# Altium PCB NBP-28 Pin_Swap_Example.PcbDoc (part 4 of 4)
Units mil, origin at the board's own origin, x right, y up, seen from the top; angles counter-clockwise.
Board outline 2716.54 x 4967.15 mil, 10 copper layers (Top Layer, Mid-Layer 1, VCC1V2, Mid-Layer 2, VCC, GND, MidLayer4, VCCINT, Mid-Layer 3, Bottom Layer), stack 81 mil thick; 254 components, 445 nets, 1667 pads, 770 vias.
Unrouted connection lines stored in the file: 611.
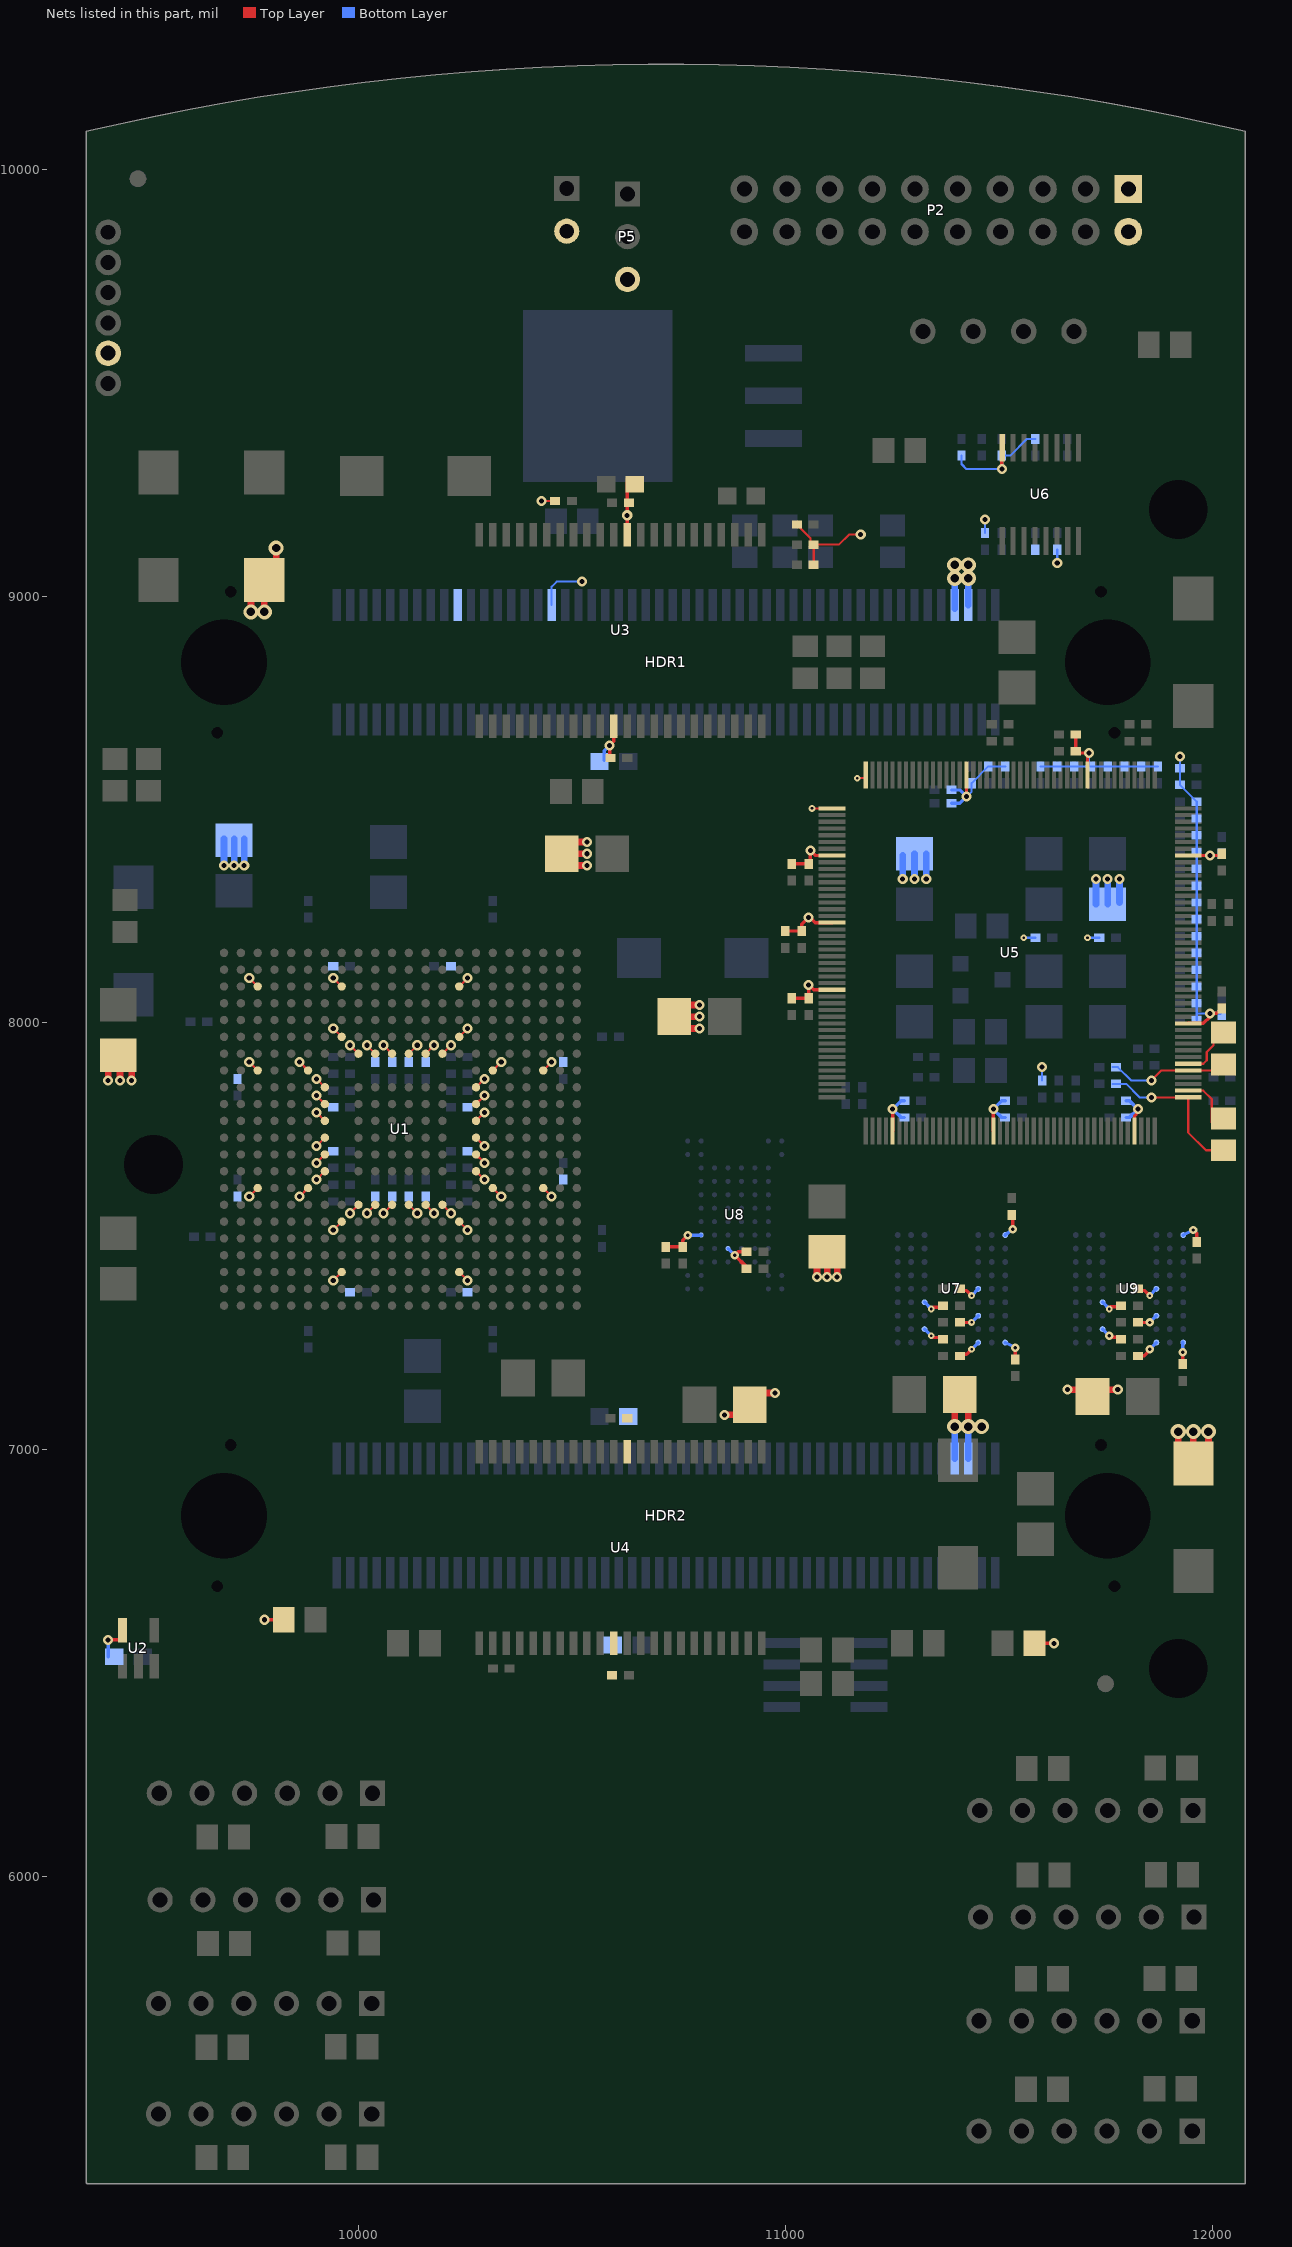
[diagram p11: the nets of this part, all layers, seen from the top]

## Via types
v1: diameter 23.62, hole 11.81, Top Layer to Bottom Layer, 495 vias
v2: diameter 78.74, hole 47.24, Top Layer to Bottom Layer, 101 vias
v3: diameter 15.75, hole 5.91, Top Layer to Bottom Layer, 92 vias
v4: diameter 35.43, hole 19.68, Top Layer to Bottom Layer, 59 vias
v5: diameter 19.68, hole 7.87, Top Layer to Bottom Layer, 23 vias

## Nets (pads, with @x,y where several pads share a name; then routed paths per layer and width w, separated by ;. In a path a pad name is that pad's centre, name@x,y a point inside that pad or via, vN(x,y) a via of type N, cw(c..) or ccw(c..) an arc to the next point about the centre after c; other vN are vias at no path point) (continued)
VCC3V3: C1.2 C12.1 C13.1 C14.1 C15.1 C30.1 C31.1 C32.1 C33.1 C34.1 C35.1 C36.1 C37.1 C38.1 C39.1 C40.1 C41.1 C42.1 C43.1 C44.1 C45.1 C46.1 C47.1 C48.1 C49.1 C50.1 C51.1 C52.1 C53.1 C54.1 C55.1 C56.1 C57.1 C58.1 C62.1 C66.1 C67.1 C68.1 C69.1 C70.1 C71.1 C72.1 C73.1 C74.1 C75.1 C76.1 C77.1 C78.1 C79.1 C80.1 C81.1 C82.1 C83.1 C84.1 C85.1 C86.1 C87.1 C102.1 C103.1 C104.1 C105.1 C106.1 C107.1 C108.1 C109.1 C110.1 C111.1 C112.1 C113.1 C114.1 C115.1 C116.1 C117.1 C118.1 C119.1 C120.1 C121.1 C122.1 C126.1 C127.1 HDR1.34 HDR1.94 HDR1.96 HDR2.94 HDR2.96 P1.2 P2.1 P2.2 P5.3 R1.1 R5.1 R15.2 R16.2 R17.2 R18.2 R20.2 R21.2 R22.2 R23.2 R24.2 R25.2 R26.2 R27.2 R28.2 R29.2 R30.2 R31.2 R32.2 R33.2 R34.2 R35.2 R39.2 R40.2 R41.2 R42.2 R43.2 R45.2 R48.2 R49.2 R50.2 R51.2 R52.2 R53.2 R54.2 R55.2 R56.2 R57.2 R61.1 R62.1 R67.1 TP1.1 U1.C8 U1.C15 U1.F8 U1.F15 U1.G9 U1.G10 U1.G11 U1.G12 U1.G13 U1.G14 U1.H3 U1.H6 U1.H17 U1.H20 U1.J7 U1.J16 U1.K7 U1.K16 U1.L7 U1.L16 U1.M7 U1.M16 U1.N7 U1.N16 U1.P7 U1.P16 U1.R3 U1.R6 U1.R17 U1.R20 U1.T9 U1.T10 U1.T11 U1.T12 U1.T13 U1.T14 U1.U8 U1.U15 U1.Y8 U1.Y15 U2.5 U3.11 U3.33 U4.11 U4.33 U5.1 U5.8 U5.18 U5.28 U5.49 U5.64 U5.85 U5.100 U5.125 U5.143 U5.161 U5.176 U6.16 U7.A7 U7.A9 U7.B3 U7.C7 U7.D3 U7.E7 U7.J9 U8.H7 U8.J5 U9.A7 U9.A9 U9.B3 U9.C7 U9.D3 U9.E7 U9.J9 | length 8194.9
  Top Layer w5: v1(9743.57,7593.48) U1.R3@9763.26,7613.17 ; v1(9743.57,7908.45) U1.H3@9763.26,7888.76 ; v1(9861.68,7593.48) U1.R6@9881.37,7613.17 ; v1(9861.68,7908.45) U1.H6@9881.37,7888.76 ; v1(9901.05,7632.85) U1.P7@9920.74,7652.54 ; v1(9901.05,7672.22) U1.N7@9920.74,7691.91 ; v1(9901.05,7711.59) U1.M7@9920.74,7731.28 ; v1(9901.05,7790.34) U1.L7@9920.74,7770.65 ; v1(9901.05,7829.71) U1.K7@9920.74,7810.02 ; v1(9901.05,7869.08) U1.J7@9920.74,7849.39 ; v1(9940.42,7396.63) U1.Y8@9960.11,7416.32 ; v1(9940.42,7514.74) U1.U8@9960.11,7534.43 ; v1(9940.42,7987.19) U1.F8@9960.11,7967.5 ; v1(9940.42,8105.3) U1.C8@9960.11,8085.61 ; v1(9979.79,7554.11) U1.T9@9999.48,7573.8 ; v1(9979.79,7947.82) U1.G9@9999.48,7928.13 ; v1(10019.16,7554.11) U1.T10@10038.85,7573.8 ; v1(10019.16,7947.82) U1.G10@10038.85,7928.13 ; v1(10058.53,7554.11) U1.T11@10078.22,7573.8 ; v1(10058.53,7947.82) U1.G11@10078.22,7928.13 ; U1.T12@10117.59,7573.8 v1(10137.27,7554.11) ; U1.G12@10117.59,7928.13 v1(10137.27,7947.82) ; U1.T13@10156.96,7573.8 v1(10176.64,7554.11) ; U1.G13@10156.96,7928.13 v1(10176.64,7947.82) ; U1.T14@10196.33,7573.8 v1(10216.01,7554.11) ; U1.G14@10196.33,7928.13 v1(10216.01,7947.82) ; U1.Y15@10235.7,7416.32 v1(10255.38,7396.63) ; U1.U15@10235.7,7534.43 v1(10255.38,7514.74) ; U1.F15@10235.7,7967.5 v1(10255.38,7987.19) ; U1.C15@10235.7,8085.61 v1(10255.38,8105.3) ; U1.P16@10275.07,7652.54 v1(10294.75,7632.85) ; U1.N16@10275.07,7691.91 v1(10294.75,7672.22) ; U1.M16@10275.07,7731.28 v1(10294.75,7711.59) ; U1.L16@10275.07,7770.65 v1(10294.75,7790.34) ; U1.K16@10275.07,7810.02 v1(10294.75,7829.71) ; U1.J16@10275.07,7849.39 v1(10294.75,7869.08) ; U1.R17@10314.44,7613.17 v1(10334.12,7593.48) ; U1.H17@10314.44,7888.76 v1(10334.12,7908.45) ; v1(10428.61,9223.41) R17.2@10460.11,9223.41 ; U1.R20@10432.55,7613.17 v1(10452.23,7593.48) ; U1.H20@10432.55,7888.76 v1(10452.23,7908.45) ; R24.2@11027.04,9168.29 11058.53,9136.79 R15.2@11058.53,9121.04 ; v3(11062.47,8502.93) U5.1@11109.71,8502.93 ; R18.2@11066.41,9073.8 R15.2@11066.41,9121.04 11125.46,9121.04 11149.08,9144.67 v1(11176.64,9144.67) ; v3(11168.77,8573.8) U5.176@11188.45,8573.8
  Top Layer w7.87: v1(9412.86,6554.11) U2.5@9452.23,6554.11 ; v1(9779,6601.36) R16.2@9824.28,6601.36 ; C53.1@10590.03,8621.04 10588.06,8623.01 v1(10588.06,8650.57) 10597.9,8660.41 U3.11@10597.9,8695.85 ; U3.33@10629.4,9139.74 U3.33@10629.4,9144.67 v1(10629.4,9189.94) C51.1@10629.4,9274.59 ; C105.1@10719.95,7475.37 C104.1@10759.32,7475.37 10759.32,7491.12 v5(10771.13,7502.93) ; C103.1@10908.93,7424.19 10908.93,7428.13 v5(10881.37,7455.69) 10889.24,7463.56 C106.1@10908.93,7463.56 ; C71.1@10999.48,8215.53 C81.1@11038.85,8215.53 11038.85,8231.28 v1(11054.59,8247.03) 11058.53,8247.03 11070.34,8235.22 U5.18@11109.71,8235.22 ; C70.1@11015.22,8058.05 C80.1@11054.59,8058.05 v1(11054.59,8089.55) 11066.41,8077.74 U5.28@11109.71,8077.74 ; C68.1@11015.22,8373.01 C78.1@11054.59,8373.01 ; C78.1@11058.53,8376.95 v1(11058.53,8404.51) 11070.34,8392.7 U5.8@11109.71,8392.7 ; U5.49@11251.45,7747.03 v1(11251.45,7798.21) ; v3(11342,7266.71) 11345.93,7262.78 C119.1@11373.49,7262.78 ; v3(11342,7329.7) 11345.93,7333.64 C121.1@11365.62,7333.64 ; C120.1@11404.99,7223.41 11424.67,7223.41 v3(11436.48,7235.22) ; C109.1@11404.99,7373.01 11424.67,7373.01 v3(11436.48,7361.2) ; C118.1@11408.93,7298.21 v3(11436.48,7298.21) ; v1(11424.67,8530.49) U5.161@11424.67,8581.67 ; U5.64@11487.67,7747.03 v1(11487.67,7798.21) ; v1(11507.35,9298.21) U6.16@11507.35,9347.42 ; v5(11532.94,7516.71) C122.1@11532.94,7548.21 ; C108.1@11538.85,7215.53 v5(11538.85,7239.15) ; R5.1@11584.12,6546.24 v1(11629.4,6546.24) ; C86.1@11680.58,8636.79 C76.1@11680.58,8676.16 ; C86.1@11684.52,8632.85 v1(11712.08,8632.85) ; U5.143@11708.14,8581.67 v1@11708.14,8628.92 ; v3@11758.32,7330.7 11762.26,7334.64 C116.1@11781.95,7334.64 ; v5@11758.33,7267.71 11762.26,7263.78 C115.1@11789.82,7263.78 ; U5.85@11818.37,7747.03 11818.37,7782.46 11826.25,7790.33 v1(11826.25,7798.21) ; C117.1@11821.32,7220.47 11841,7220.47 v5@11852.82,7232.28 ; C107.1@11822.31,7373.01 11842,7373.01 v3(11853.81,7361.2) ; C112.1@11826.25,7298.21 v5(11853.81,7298.21) ; C114.1@11931.56,7200.78 v5(11931.56,7228.34) ; U5.100@11944.36,7999 11979.79,7999 11995.54,8014.74 v1(11995.54,8022.62) 12011.29,8022.62 C84.1@12023.1,8034.43 ; U5.125@11944.36,8392.7 v1(11995.54,8392.7) C75.1@12019.16,8392.7 ; v5(11956.17,7514.74) 11964.04,7506.87 C113.1@11964.04,7487.18
  Top Layer w15.75: C32.1@9404.99,7928.13 9412.86,7924.19 v1(9412.86,7865.14) ; C32.1@9436.48,7928.13 9440.42,7924.19 v1(9440.42,7865.14) ; v1(9467.98,7865.14) C32.1@9467.98,7928.13 ; v4(9747.51,8963.56) C127.1@9747.51,9026.55 ; v4(9779,8963.56) C127.1@9779,9022.62 ; C127.1@9806.56,9050.18 v4(9806.56,9113.17) ; C49.1@10471.92,8369.07 v1(10534.91,8369.07) ; C49.1@10471.92,8424.19 v1(10534.91,8424.19) ; C49.1@10475.85,8396.63 v1(10534.91,8396.63) ; C31.1@10735.7,7987.18 v1(10798.69,7987.18) ; C31.1@10735.7,8042.3 v1(10798.69,8042.3) ; C31.1@10739.63,8014.74 v1(10798.69,8014.74) ; v1(10857.74,7081.67) C50.1@10908.93,7081.67 ; C50.1@10912.86,7132.85 v1(10975.85,7132.85) ; v1(11074.28,7404.51) C102.1@11074.28,7447.81 ; v1(11097.9,7404.51) C102.1@11097.9,7455.69 ; v1(11121.52,7404.51) C102.1@11121.52,7451.75 ; v4(11397.11,7054.11) C110.1@11397.11,7113.17 ; C110.1@11408.93,7128.92 11428.61,7109.23 v4(11428.61,7054.11) ; v1(11660.89,7140.73) v1(11779,7140.73) ; C126.1@11920.74,6999 v4(11920.74,7042.3) ; C126.1@11956.17,6967.5 v4(11956.17,7042.3) ; C126.1@11991.6,6983.25 v4(11991.6,7042.3)
  Bottom Layer w5: HDR1.34@10452.23,8979.31 10452.23,9022.62 10464.04,9034.43 v1(10523.1,9034.43) ; R67.1@11412.86,9329.7 11412.86,9310.02 11424.67,9298.21 v1(11507.35,9298.21) ; v1(11424.67,8530.49) 11436.48,8542.3 R56.2@11436.48,8561.99 R55.2@11475.85,8601.36 R54.2@11515.22,8601.36 ; R57.2@11467.98,9148.6 v1(11467.98,9180.1) ; C62.1@11507.35,9329.7 11527.04,9329.7 11566.41,9369.07 R62.1@11586.09,9369.07 ; v3(11558.53,8199.78) R29.2@11586.09,8199.78 ; R52.2@11597.9,8601.36 R51.2@11712.08,8601.36 ; R20.2@11601.84,7865.14 v1(11601.84,7896.63) ; v1(11637.27,9077.74) R61.1@11637.27,9109.23 ; v3(11708.14,8199.78) R30.2@11735.7,8199.78 ; v1(11712.08,8632.85) R51.2@11712.08,8601.36 ; R41.2@11873.49,8601.36 R42.2@11834.12,8601.36 R51.2@11712.08,8601.36 ; v1(11924.67,8624.98) R49.2@11924.67,8597.42 R40.2@11924.67,8558.05 R48.2@11964.04,8518.68 R39.2@11964.04,8479.31 R28.2@11964.04,8321.83 R35.2@11964.04,8203.72 R21.2@11964.04,8085.61 11964.04,8022.62 ; R23.2@11964.04,8006.87 11964.04,8022.62 ; R26.2@11967.98,8392.7 v1(11995.54,8392.7) ; v1(11995.54,8022.62) 11964.04,8022.62
  Bottom Layer w7.87: C1.2@9412.86,6514.74 v1(9412.86,6554.11) ; C52.1@10575.26,8615.14 10575.26,8637.78 v1(10588.06,8650.57) ; v5(10771.13,7502.93) U8.H7@10802.63,7502.93 ; U8.J5@10865.62,7471.44 v5(10881.37,7455.69) ; C79.1@11279,7778.52 11271.13,7778.52 v1(11251.45,7798.21) 11271.13,7817.89 C69.1@11279,7817.89 ; U7.B3@11326.25,7282.46 v3(11342,7266.71) ; U7.D3@11326.25,7345.45 v3(11342,7329.7) ; C87.1@11389.24,8514.74 11408.93,8514.74 v1(11424.67,8530.49) 11408.93,8546.24 C77.1@11389.24,8546.24 ; v3(11436.48,7235.22) U7.A7@11452.23,7250.96 ; v3(11436.48,7298.21) U7.C7@11452.23,7313.96 ; v3(11436.48,7361.2) U7.E7@11452.23,7376.95 ; v1(11507.35,9298.21) C62.1@11507.35,9329.7 ; U7.A9@11515.22,7250.96 v5(11538.85,7239.15) ; U7.J9@11515.22,7502.93 v5(11532.94,7516.71) ; C83.1@11515.22,7778.52 11507.35,7778.52 v1(11487.67,7798.21) 11507.35,7817.89 C73.1@11515.22,7817.89 ; U9.B3@11743.57,7282.46 v5(11759.32,7266.71) ; U9.D3@11743.57,7345.45 v3(11759.32,7329.7) ; C82.1@11798.69,7778.52 11806.56,7778.52 v1(11826.25,7798.21) 11806.56,7817.89 C72.1@11798.69,7817.89 ; v5(11853.81,7235.22) U9.A7@11869.56,7250.96 ; v5(11853.81,7298.21) U9.C7@11869.56,7313.96 ; v3(11853.81,7361.2) U9.E7@11869.56,7376.95 ; v5(11931.56,7228.34) U9.A9@11931.56,7251.96 ; U9.J9@11932.55,7502.93 v5(11956.17,7514.74) ; v1(11995.54,8022.62) C74.1@12019.16,8022.62 ; v1(11995.54,8392.7) C85.1@12019.16,8392.7
  Bottom Layer w15.75: v1(9684.52,8369.07) C30.1@9684.52,8432.07 ; v1(9708.14,8369.07) C30.1@9708.14,8428.13 C30.1@9708.14,8432.07 ; v1(9731.76,8369.07) C30.1@9731.76,8432.07 ; v1(11275.07,8337.58) C67.1@11275.07,8392.7 ; v1(11302.63,8337.58) C67.1@11302.63,8396.63 ; v1(11330.19,8337.58) C67.1@11330.19,8396.63 ; HDR2.94@11397.12,6979.31 v4(11397.11,7054.11) v4(11428.61,7054.11) ; HDR1.94@11397.11,8971.44 HDR1.94@11397.11,8979.31 v4(11397.11,9042.3) ; HDR2.96@11428.61,6979.31 v4(11428.61,7054.11) ; HDR1.96@11428.61,8979.31 v4(11428.61,9042.3) ; v4(11460.11,7054.11) v4(11428.61,7054.11) ; C66.1@11727.82,8278.52 v1(11727.82,8337.58) ; C66.1@11755.38,8278.52 v1(11755.38,8337.58) ; C66.1@11782.94,8282.46 v1(11782.94,8337.58) ; v4(11397.11,9042.3) v4(11428.61,9042.3) ; v4(11397.11,9042.3) v4(11397.11,9073.8) v4(11428.61,9073.8) v4(11428.61,9042.3)
VDRIVE: HDR1.20 U1.C3 | length 27.8
  Top Layer w5: v1(9743.57,8105.3) U1.C3@9763.26,8085.61
XTALIN: C59.2 R38.1 U5.93 | length 278.7
  Top Layer w5: v1(11857.74,7865.14) 11881.37,7888.76 U5.93@11944.36,7888.76 R38.1@12023.1,7888.76
  Bottom Layer w5: C59.2@11767.19,7896.63 C59.2@11775.07,7896.63 11779,7896.63 11810.5,7865.14 v1(11857.74,7865.14)
XTALIN_32K: C60.2 R47.1 U5.89 | length 372.7
  Top Layer w5: v1(11857.74,7825.77) U5.89@11944.36,7825.77 11944.36,7743.09 11985.7,7701.75 R47.1@12027.04,7701.75
  Bottom Layer w5: C60.2@11767.19,7857.26 C60.2@11775.07,7857.26 11798.69,7857.26 11830.19,7825.77 v1(11857.74,7825.77)
XTALOUT: R38.2 U5.94 | length 108.2
  Top Layer w5: U5.94@11944.36,7904.51 11979.79,7904.51 11987.67,7912.38 11987.67,7932.07 12003.41,7947.81 R38.2@12003.41,7967.5
XTALOUT_32K: R47.2 U5.90 | length 118.4
  Top Layer w5: U5.90@11944.36,7841.52 11979.79,7841.52 11999.48,7821.83 R47.2@11999.48,7766.71
pads on no net: D1.2 HDR1.91 HDR1.MH1 HDR1.MH2 HDR1.MH3 HDR1.MH4 HDR1.MH5 HDR1.MH6 HDR2.MH1 HDR2.MH2 HDR2.MH3 HDR2.MH4 HDR2.MH5 HDR2.MH6 P3_ch1.3 P3_ch1.6 P3_ch2.3 P3_ch2.6 P3_ch3.3 P3_ch3.6 P3_ch4.3 P3_ch4.6 P4_ch1.3 P4_ch1.6 P4_ch2.3 P4_ch2.6 P4_ch3.3 P4_ch3.6 P4_ch4.3 P4_ch4.6 U2.1 U5.145 U5.157 U5.162 U7.E2 U8.A1 U8.A2 U8.A7 U8.A8 U8.B1 U8.B7 U8.B8 U8.L1 U8.L2 U8.L7 U8.L8 U8.M1 U8.M2 U8.M7 U8.M8 U9.E2 U10.5 U10.8

## Polygon pours and split planes (outlines as drawn)
VCC1V2 on VCC1V2 (split plane): 10788.26,10226.6 10856.59,10225.42 10924.91,10223.45 10993.19,10220.69 11061.44,10217.14 11129.64,10212.8 11197.79,10207.67 11265.88,10201.76 11333.89,10195.06 11401.82,10187.58 11469.66,10179.31 11537.4,10170.26 11605.02,10160.43 11672.54,10149.81 11739.92,10138.42 11807.17,10126.25 11874.27,10113.31 11941.22,10099.59 12008.01,10085.09 12058.12,10073.61 12058.12,5299.8 9381.78,5299.8 9381.78,10073.63 9431.84,10085.09 9498.62,10099.59 9565.57,10113.31 9632.68,10126.25 9699.92,10138.42 9767.31,10149.81 9834.82,10160.43 9902.45,10170.26 9970.19,10179.31 10038.03,10187.58 10105.96,10195.06 10173.97,10201.76 10242.06,10207.67 10310.2,10212.8 10378.41,10217.14 10446.66,10220.69 10514.94,10223.45 10583.25,10225.42 10651.58,10226.6 10719.92,10227
VCC1V8 on VCC1V2 (split plane): 12044.9,8692.89 12044.9,7865 12044.9,6557.11 12039.13,6551.34 11375.87,6551.34 11305.1,6622.11 11305.1,7630 11304.71,7631.95 11303.6,7633.6 11100.1,7837.11 11100.1,8442.89 11353.6,8696.4 11353.61,8696.4 11382.11,8724.9 12012.89,8724.9
VCC3V3 on VCC (split plane): 10788.26,10226.6 10856.59,10225.42 10924.91,10223.45 10993.19,10220.69 11061.44,10217.14 11129.64,10212.8 11197.79,10207.67 11265.88,10201.76 11333.89,10195.06 11401.82,10187.58 11469.66,10179.31 11537.4,10170.26 11605.02,10160.43 11672.54,10149.81 11739.92,10138.42 11807.17,10126.25 11874.27,10113.31 11941.22,10099.59 12008.01,10085.09 12058.12,10073.61 12058.12,5299.8 9381.78,5299.8 9381.78,10073.63 9431.84,10085.09 9498.62,10099.59 9565.57,10113.31 9632.68,10126.25 9699.92,10138.42 9767.31,10149.81 9834.82,10160.43 9902.45,10170.26 9970.19,10179.31 10038.03,10187.58 10105.96,10195.06 10173.97,10201.76 10242.06,10207.67 10310.2,10212.8 10378.41,10217.14 10446.66,10220.69 10514.94,10223.45 10583.25,10225.42 10651.58,10226.6 10719.92,10227
GND on GND (split plane): 10788.26,10226.6 10856.59,10225.42 10924.91,10223.45 10993.19,10220.69 11061.44,10217.14 11129.64,10212.8 11197.79,10207.67 11265.88,10201.76 11333.89,10195.06 11401.82,10187.58 11469.66,10179.31 11537.4,10170.26 11605.02,10160.43 11672.54,10149.81 11739.92,10138.42 11807.17,10126.25 11874.27,10113.31 11941.22,10099.59 12008.01,10085.09 12058.12,10073.61 12058.12,5299.8 9381.78,5299.8 9381.78,10073.63 9431.84,10085.09 9498.62,10099.59 9565.57,10113.31 9632.68,10126.25 9699.92,10138.42 9767.31,10149.81 9834.82,10160.43 9902.45,10170.26 9970.19,10179.31 10038.03,10187.58 10105.96,10195.06 10173.97,10201.76 10242.06,10207.67 10310.2,10212.8 10378.41,10217.14 10446.66,10220.69 10514.94,10223.45 10583.25,10225.42 10651.58,10226.6 10719.92,10227
VCC2V5 on VCCINT (split plane): 10788.26,10226.6 10856.59,10225.42 10924.91,10223.45 10993.19,10220.69 11061.44,10217.14 11129.64,10212.8 11197.79,10207.67 11265.88,10201.76 11333.89,10195.06 11401.82,10187.58 11469.66,10179.31 11537.4,10170.26 11605.02,10160.43 11672.54,10149.81 11739.92,10138.42 11807.17,10126.25 11874.27,10113.31 11941.22,10099.59 12008.01,10085.09 12058.12,10073.61 12058.12,9459.09 12053.6,9463.6 12051.95,9464.71 12050,9465.1 11085,9465.1 11083.05,9464.71 11081.4,9463.6 10946.4,9328.6 10945.29,9326.95 10944.9,9325 10944.9,6615 10945.29,6613.05 10946.4,6611.4 11031.4,6526.4 11033.05,6525.29 11035,6524.9 12050,6524.9 12051.95,6525.29 12053.6,6526.4 12058.12,6530.91 12058.12,5299.8 9381.78,5299.8 9381.78,10073.63 9431.84,10085.09 9498.62,10099.59 9565.57,10113.31 9632.68,10126.25 9699.92,10138.42 9767.31,10149.81 9834.82,10160.43 9902.45,10170.26 9970.19,10179.31 10038.03,10187.58 10105.96,10195.06 10173.97,10201.76 10242.06,10207.67 10310.2,10212.8 10378.41,10217.14 10446.66,10220.69 10514.94,10223.45 10583.25,10225.42 10651.58,10226.6 10719.92,10227
+5V on VCCINT (split plane): 12054.9,9447.89 12054.9,6542.11 12047.89,6535.1 11037.11,6535.1 10955.1,6617.11 10955.1,9322.89 11087.11,9454.9 12047.89,9454.9

## Keep-outs
Top Layer:
  circle w10: c11750.4,6451.11 r98.43
  circle w10: c9482.69,9978.67 r98.43
Bottom Layer:
  circle w10: c11750.4,6451.11 r98.43
  circle w10: c9482.69,9978.67 r98.43
  rectangle: 11471.92,9707.66 11668.77,9802.14
Keep-Out Layer:
  the board outline again, w31.5

## Other copper
Bottom Layer:
  region: 11562.47,7439.94 11617.59,7439.94
VCCINT (plane layer: these items are gaps in the copper):
  lines w10: 10950,6615 11035,6530 11160,6530 12050,6530 12060,6540 12060,9450 12050,9460 11085,9460 10950,9325 10950,6615
VCC1V2 (plane layer: these items are gaps in the copper):
  lines w10: 11095,7835 11300,7630 11300,6620 11373.76,6546.24 11481.24,6546.24 12041.24,6546.24 12050,6555 12050,7865 12050,8695 12015,8730 11750,8730 11380,8730 11350,8700 11095,8445 11095,7835

## Silkscreen, mask and mechanical layers (free items; w line width, h text height)
Top Overlay:
  circle w5: c11920.74,9203.72 r98.43
  circle w5: c9519.16,7668.29 r98.43
  circle w5: c11920.74,6487.18 r62.99
  circle w5: c9519.16,7668.29 r62.99
  circle w5: c9519.16,7668.29 r108.27
  circle w5: c11920.74,9203.72 r62.99
  circle w5: c11920.74,9203.72 r108.27
  circle w10: c11605.78,7569.86 r106.3
  circle w10: c11578.22,7231.28 r106.3
  circle w10: c10452.23,9282.46 r98.43
  lines w3.15: 11086.09,9589.55 11290.82,9589.55 11322.31,9621.04 ; 11093.97,9660.41 11401.05,9660.41 11440.42,9621.04 ; 11440.42,9660.41 11519.16,9660.41 11558.53,9621.04 ; 11676.64,9621.04 11716.01,9660.41 11822.31,9660.41 ; 12034.91,8010.81 12050.66,8026.55 12050.66,8199.78
  lines w5: 9361.68,6378.92 9401.05,6378.92 9404.68,6378.23 9408.01,6376.03 9410.2,6372.7 9410.89,6369.08 9410.89,6329.7 ; 9361.68,6388.76 9420.74,6388.76 9420.74,6329.7 ; 9361.68,7820.85 9440.42,7820.85 9444.05,7821.54 9447.38,7823.73 9449.57,7827.06 9450.26,7830.69 9450.26,7860.22 9449.57,7863.84 9447.38,7867.18 9444.05,7869.37 9440.42,7870.06 9361.68,7870.06 ; 9361.68,9302.15 9420.74,9302.15 9420.74,9357.26 ; 9361.68,9321.83 9401.05,9321.83 9404.68,9322.52 9408.01,9324.71 9410.2,9328.05 9410.89,9331.67 9410.89,9355.3 ; 9361.73,9345.45 cw(c10719.97,3565.9) 12078.22,9345.45 ; 9361.73,9424.19 cw(c10719.97,3644.64) 12078.22,9424.19 ; 9362.02,7189.51 9452.57,7189.51 9452.57,7264.31 9362.05,7264.31 ; 9362.02,8421.79 9452.57,8421.79 9452.57,8496.59 9362.05,8496.59 ; 9479.79,7668.29 9519.16,7668.29 ; 9519.16,7628.92 9519.16,7668.29 ; 9519.16,7707.66 9519.16,7668.29 ; 9558.53,7668.29 9519.16,7668.29 ; 9979.79,9455.69 9979.79,9404.51 10030.97,9404.51 10030.97,9459.63 ; 10085.11,9466.52 10085.11,9410.81 10085.8,9407.18 10087.99,9403.85 10091.33,9401.66 10094.95,9400.96 10124.48,9400.96 10128.1,9401.66 10131.44,9403.85 10133.63,9407.18 10134.32,9410.81 10134.32,9472.42 ; 10090.03,6546.24 10129.4,6546.24 ; 10129.4,6506.87 10129.4,6546.24 ; 10129.4,6585.61 10129.4,6546.24 ; 10168.77,6546.24 10129.4,6546.24 ; 11271.13,6546.24 11310.5,6546.24 ; 11305.58,9472.42 11305.58,9410.81 11306.27,9407.18 11308.46,9403.85 11311.8,9401.66 11315.42,9400.96 11344.95,9400.96 11348.57,9401.66 11351.91,9403.85 11354.1,9407.18 11354.79,9410.81 11354.79,9466.52 ; 11310.5,6506.87 11310.5,6546.24 ; 11310.5,6585.61 11310.5,6546.24 ; 11318.37,9471.44 11318.37,9428.13 11369.55,9428.13 11369.56,9467.5 ; 11349.87,6546.24 11310.5,6546.24 ; 11819,6524.21 cw(c11920.74,6487.18) 11844.18,6410.63 ; 11828.25,6520.85 cw(c11920.74,6487.19) 11845.34,6423.92 ; 11881.37,6487.18 11920.74,6487.18 ; 11881.37,9203.72 11920.74,9203.72 ; 11920.74,6447.81 11920.74,6487.18 ; 11920.74,6526.55 11920.74,6487.18 ; 11920.74,9164.35 11920.74,9203.72 ; 11920.74,9243.09 11920.74,9203.72 ; 11960.11,6487.18 11920.74,6487.18 ; 11960.11,9203.72 11920.74,9203.72 ; 12019.16,6329.7 12019.16,6388.76 12078.22,6388.76 ; 12019.16,9357.26 12019.16,9302.14 12078.22,9302.14 ; 12029,6329.7 12029,6369.08 12029.7,6372.7 12031.89,6376.03 12035.22,6378.23 12038.85,6378.92 12078.22,6378.92 ; 12029,9355.3 12029,9331.67 12029.7,9328.05 12031.89,9324.71 12035.22,9322.52 12038.85,9321.83 12078.22,9321.83 ; 12078.19,7191.91 11987.66,7191.91 11987.66,7266.71 12078.22,7266.71 ; 12078.22,7820.85 11999.48,7820.85 11995.85,7821.54 11992.52,7823.73 11990.33,7827.06 11989.63,7830.69 11989.63,7860.22 11990.33,7863.84 11992.52,7867.18 11995.85,7869.37 11999.48,7870.06 12078.22,7870.06 ; 12078.53,8424.19 11988.01,8424.19 11988.01,8499 12078.56,8499 ; 10090.03,6506.87 cw(c10090.03,6546.24) 10090.03,6585.61 10168.77,6585.61 cw(c10168.77,6546.24) 10168.77,6506.87 10090.03,6506.87 ; 11271.13,6506.87 cw(c11271.13,6546.24) 11271.13,6585.61 11349.87,6585.61 cw(c11349.87,6546.24) 11349.87,6506.87 11271.13,6506.87
  text "LH79520 EXT DEBUG" at 11082.15,10109.23 h31.5
  text "OPEN: INTEGRATED" at 10629.4,9648.6 h31.5 r90
  text "CLOSED: EXTERNAL" at 10672.7,9648.6 h31.5 r90
  text "LH79520 DEBUG SELECT" at 10582.15,9593.48 h31.5 r90
  text "EXT DEBUG" at 11771.13,9499 h31.5
  text "ALL" at 10412.86,9310.02 h31.5
  text "4k7" at 10408.93,9262.78 h31.5
  text "ALL" at 11566.41,7585.61 h31.5
  text "100nF" at 11558.53,7538.37 h31.5
  text "ALL" at 11554.59,7243.09 h31.5
  text "10nF" at 11562.47,7195.85 h31.5
  text "LOADED" at 10042.78,6396.63 h31.5
  text "POWER" at 11251.45,6396.63 h31.5
  text "Altium Advanced Training: '.Pcb_File_Name_No_Path'" at 9380,5166.66 h50
Bottom Overlay:
  drawing of 888 lines, arcs and shapes, not listed
  text "NBP#28" at 11738.59,10045.6 h31.5
  text "REV 1.00" at 11407.89,10041.66 h31.5
  text "1" at 9911.68,8629.7 h31.5
  text "1" at 9903.95,6675.52 h31.5
Mechanical 1:
  lines w9.84: 9361.67,5229.55 9361.7,10089.55 cw(c10719.95,4310) 12078.22,10089.54 12078.22,5229.55 ; 9361.68,5229.7 12078.22,5229.7
  text "PCB boundary coincides with centre-line of tracks and arc" at 9356.76,4813.24 h31.5
Mechanical 2:
  text ".Printout_Name" at 9356.76,5049.46 h31.5
Mechanical 3:
  text ".Printout_Name" at 9356.76,4891.98 h31.5
Mechanical 11:
  drawing of 689 lines, arcs and shapes, not listed
  text "NBP28 Rev1.00" at 20080.76,14835.7 h50
  text "DESIGN INFORMATION" at 17875.76,14830.7 h60
  text "BOARD NAME:" at 19355.76,14830.7 h60
  text "BOARD TECHNOLOGY" at 17875.76,14730.7 h60
  text "BOARD SIZE (REFER ALSO PROFILING INFORMATION)" at 19775.76,14730.7 h50
  text "5.000" at 17959.26,14644.52 h60
  text "69.00mm" at 19882.84,14641.18 h60
  text "12.000" at 18495.39,14638.57 h60
  text "81.00mm" at 20788.36,14637.24 h60
  text "5.000" at 19047.77,14632.71 h60
  text "X" at 20510.76,14610.7 h70
  text "(MIN. TRACK/   PADS  /   CLEARANCE     IN 0.001'')" at 17815.76,14530.7 h50
  text "MINIMUM ANNULAR RING 0.125MM (0.005'') EXTERNAL PER IPC-2221 CLASS 3 LEVEL C AND IS THE" at 17875.76,14430.7 h50
  text "MANUFACTURING REGISTRATION ALLOWANCE" at 17875.76,14340.7 h50
  text "LAND SIZE CALCULATION MINIMUM - NOMINAL HOLE SIZE + 0.508MM (0.020'')" at 17875.76,14230.7 h50
  text "CIRCUIT TYPE:" at 17875.76,14050.7 h60
  text "SS" at 18775.76,14050.7 h50
  text "DS" at 19475.76,14050.7 h50
  text "X" at 20050.76,14050.7 h60
  text "PTH" at 20175.76,14050.7 h50
  text "ML" at 20605.76,14050.7 h50
  text "X" at 20755.76,14050.7 h60
  text "No. OF" at 20875.76,14050.7 h50
  text "8" at 21559.26,14044.52 h60
  text "FINGER CONNECTOR DIM PER:" at 17875.76,13930.7 h60
  text "AS SHOWN" at 20875.76,13930.7 h50
  text "No. OFF TOTAL" at 18535.76,13820.7 h60
  text "ONE SIDE" at 20175.76,13820.7 h50
  text "BOTH SIDES" at 20875.76,13810.7 h50
  text "VIAS:" at 17875.76,13705.7 h60
  text "NONE" at 18325.76,13705.7 h45
  text "X" at 18655.76,13705.7 h60
  text "FEED THRU'" at 18775.76,13705.7 h45
  text "TENTED" at 19475.76,13705.7 h45
  text "BURIED LAYER SEQUENCE" at 20175.76,13705.7 h45
  text "UNIQUE DRILL" at 18775.76,13585.7 h45
  text "2 SIZE" at 19475.76,13585.7 h45
  text "BLIND LAYER SEQUENCE" at 20175.76,13585.7 h45
  text "Layer Stack Manager (Protel)" at 19270.76,13495.7 h50
  text "X" at 20755.76,13495.7 h60
  text "AS SHOWN" at 20875.76,13495.7 h50
  text "LAYER CONSTRUCTION PER:" at 17875.76,13490.7 h60
  text "Protel" at 21065.76,13390.7 h50
  text "(PFW)" at 21470.76,13385.7 h50
  text "ARTWORK:" at 17875.76,13380.7 h60
  text "MANUAL" at 18775.76,13380.7 h50
  text "DIGITISED" at 19475.76,13380.7 h50
  text "X" at 20055.76,13380.7 h60
  text "CAD" at 20175.76,13380.7 h50
  text "TYPE" at 20605.76,13380.7 h50
  text "ARTWORK/PATTERN MASTER LIST" at 17875.76,13195.7 h60
  text "DESCRIPTION" at 17925.76,13100.7 h50
  text "DRAWING No./CAD FILE REF." at 18660.76,13100.7 h50
  text "LAYER NAME" at 20285.76,13100.7 h50
  text "GERBER FILE REF" at 21102.77,13097.71 h50
  text "PCB FILE" at 17865.76,13000.7 h50
  text "NBP28 Rev1.00" at 18667.29,12998.46 h50
  text "PcbDoc" at 19897.77,12997.71 h40
  text "Top Paste Mask" at 20219.77,12900.7 h40
  text "GTP" at 21897.77,12897.71 h50
  text "GERBER FILE" at 17865.76,12895.7 h50
  text "GTO" at 21895.76,12799.72 h50
  text "Top Overlay" at 20219.77,12798.7 h40
  text "GERBER FILE" at 17865.76,12795.7 h50
  text "Top Solder Mask" at 20219.77,12702.71 h40
  text "GTS" at 21897.77,12697.71 h50
  text "GERBER FILE" at 17865.76,12695.7 h50
  text "TOP LAYER" at 20219.77,12600.7 h40
  text "GTL" at 21897.77,12597.71 h50
  text "GERBER FILE" at 17865.76,12595.7 h50
  text "MIDLAYER3" at 20219.8,12500.77 h40
  text "G3" at 21893.03,12500.77 h50
  text "GERBER FILE" at 17865.76,12495.7 h50
  text "MIDLAYER1" at 20219.8,12402.35 h40
  text "G1" at 21893.03,12402.35 h50
  text "GERBER FILE" at 17865.76,12395.7 h50
  text "VCC" at 20219.77,12300.7 h40
  text "GERBER FILE" at 17865.76,12295.7 h50
  text "GP2" at 21897.77,12291.41 h50
  text "GND" at 20219.8,12205.5 h40
  text "GP1" at 21893.03,12205.5 h50
  text "GERBER FILE" at 17865.76,12195.7 h50
  text "VCCINT" at 20219.8,12107.07 h40
  text "GERBER FILE" at 17865.76,12095.7 h50
  text "GP3" at 21897.77,12094.56 h50
  text "MIDLAYER2" at 20219.8,12008.65 h40
  text "GERBER FILE" at 17865.76,11995.7 h50
  text "G2" at 21897.77,11996.14 h50
  text "BOTTOM LAYER" at 20219.77,11900.7 h40
  text "GBL" at 21897.77,11897.71 h50
  text "GERBER FILE" at 17865.76,11895.7 h50
  text "Bottom Solder Mask" at 20219.77,11802.71 h40
  text "GBS" at 21897.77,11797.71 h50
  text "GERBER FILE" at 17865.76,11795.7 h50
  text "Bottom Overlay" at 20219.77,11700.7 h40
  text "GBO" at 21897.77,11697.71 h50
  text "GERBER FILE" at 17865.76,11695.7 h50
  text "Bottom Paste Mask" at 20219.77,11602.71 h40
  text "GBP" at 21897.77,11597.71 h50
  text "GERBER FILE" at 17865.76,11595.7 h50
  text "PCB Boundary" at 20219.77,11500.7 h40
  text "GM1" at 21897.77,11497.71 h50
  text "GERBER FILE" at 17865.76,11495.7 h50
  text "Dimensions" at 20219.77,11400.7 h40
  text "GM4" at 21897.77,11397.71 h50
  text "GERBER FILE" at 17865.76,11395.7 h50
  text "APERTURE LIST" at 17865.76,11300.7 h50
  text "APR" at 19937.14,11297.71 h50
  text "DRILL REPORT" at 17865.76,11200.7 h50
  text "DRR" at 19937.14,11197.71 h50
  text "DRILL FILE" at 17855.28,11098.07 h50
  text "DRL" at 19932.21,11092.4 h50
  text "TXT" at 19926.15,10997.67 h50
  text "EXCELLON DRILL" at 17852.33,10994.72 h50
  text "MATERIAL:" at 17875.76,10790.7 h60
  text "GLASS FIBRE EPOXY RESIN NEMA GRADE FR4 (MIL-S-13949H)" at 18885.76,10780.7 h50
  text "X" at 18780.76,10775.7 h60
  text "THICKNESS:" at 18185.76,10665.7 h50
  text "0.8mm" at 18885.76,10665.7 h50
  text "1.2mm" at 19580.76,10665.7 h50
  text "1.6mm" at 20275.76,10665.7 h50
  text "2.4mm" at 20975.76,10665.7 h50
  text "3.2mm" at 21675.76,10665.7 h50
  text "X" at 20180.76,10660.7 h60
  text "TOLERANCE:" at 18180.76,10545.7 h50
  text "IN A/W IPC-D-300G CLASS" at 18875.76,10545.7 h50
  text "3 LEVEL B" at 20250.76,10545.7 h50
  text "OTHER +/-" at 20975.76,10545.7 h50
  text "X" at 18780.76,10540.7 h60
  text "BOW & TWIST:" at 18085.76,10425.7 h50
  text "IN A/W IPC-D-300G CLASS" at 18875.76,10425.7 h50
  text "3 LEVEL B" at 20250.76,10425.7 h50
  text "AS SHOWN" at 20980.76,10420.7 h50
  text "X" at 18780.76,10415.7 h60
  text "COPPER THICKNESS (FINISHED)" at 18180.76,10295.7 h50
  text "OUTER:" at 18370.76,10205.7 h50
  text "18um" at 18885.76,10205.7 h50
  text "35um" at 19950.76,10205.7 h50
  text "70um" at 20985.76,10205.7 h50
  text "X" at 19842.77,10197.71 h60
  text "INNER SIGNAL:" at 18040.76,10085.7 h50
  text "18um" at 18885.76,10085.7 h50
  text "35um" at 19950.76,10085.7 h50
  text "70um" at 20985.76,10085.7 h50
  text "X" at 19840.76,10077.71 h60
  text "INNER PWR:" at 18185.76,9965.7 h50
  text "18um" at 18885.76,9965.7 h50
  text "35um" at 19950.76,9965.7 h50
  text "70um" at 20985.76,9965.7 h50
  text "X" at 19845.76,9960.7 h60
  text "STRUCTURE:" at 17875.76,9845.7 h60
  text "REFER" at 18885.76,9845.7 h50
  text "AS PER DRAWING No." at 18880.76,9720.7 h50
  text "AS SHOWN" at 20980.76,9720.7 h50
  text "X" at 20880.76,9715.7 h60
  text "DRILLING:" at 17875.76,9610.7 h60
  text "VIEWED FROM:" at 18070.76,9520.7 h50
  text "COMPONENT SIDE" at 18885.76,9520.7 h45
  text "SOLDER SIDE" at 19940.76,9520.7 h45
  text "X" at 18780.76,9510.7 h60
  text "REFERENCE:" at 18160.76,9400.7 h50
  text "AS SHOWN" at 18880.76,9395.7 h45
  text "PATTERN MASTER LIST" at 19945.76,9395.7 h45
  text "X" at 20880.76,9395.7 h60
  text "NC_DRILL FILES" at 20980.76,9395.7 h45
  text "X" at 18780.76,9390.7 h60
  text "PTH MINIMUM COPPER THICKNESS:" at 18390.76,9280.7 h50
  text "20um" at 19950.76,9280.7 h50
  text "X" at 19845.76,9275.7 h60
  text "OTHER" at 20980.76,9275.7 h50
  text "NPTH:" at 18410.76,9160.7 h50
  text "TENTED" at 18880.76,9155.7 h45
  text "X" at 19845.76,9155.7 h60
  text "PADS REMOVED" at 19945.76,9155.7 h45
  text "REMOVE PADS" at 20980.76,9155.7 h45
  text "X" at 18780.76,9150.7 h60
  text "2nd DRILL" at 18880.76,9035.7 h45
  text "BOTH" at 19945.76,9035.7 h45
  text "AS SHOWN" at 20430.76,9035.7 h45
  text "NONE" at 20980.76,9035.7 h45
  text "BOARD FINISH:" at 17875.76,8920.7 h60
  text "X" at 18780.76,8915.7 h60
  text "ETCHING" at 18880.76,8915.7 h45
  text "REFER PATTERN MASTER LIST" at 19945.76,8915.7 h45
  text "LEGEND / SCREEN PRINT:" at 18675.76,8800.7 h50
  text "NONE" at 19945.76,8795.7 h45
  text "COMPONENT" at 20430.76,8795.7 h45
  text "SOLDER" at 20980.76,8795.7 h45
  text "X" at 20330.76,8790.7 h60
  text "X" at 20880.76,8790.7 h60
  text "COLOUR:" at 18290.76,8680.7 h50
  text "WHITE" at 18880.76,8675.7 h45
  text "YELLOW" at 19945.76,8675.7 h45
  text "OTHER" at 20980.76,8675.7 h45
  text "X" at 18780.76,8670.7 h60
  text "X" at 18780.76,8555.7 h60
  text "LIQUID PHOTOIMAGEABLE" at 18880.76,8555.7 h45
  text "SCREEN PRINT" at 20430.76,8555.7 h45
  text "MATTE" at 18880.76,8435.7 h45
  text "GLOSS" at 19380.76,8435.7 h45
  text "GREEN" at 19945.76,8435.7 h45
  text "BLUE" at 20430.76,8435.7 h45
  text "G/Y" at 20980.76,8435.7 h45
  text "OTHER" at 21430.76,8435.7 h45
  text "X" at 19275.76,8430.7 h60
  text "SOLDER MASK COLOUR:" at 17875.76,8320.7 h45
  text "BLACK" at 18880.76,8315.7 h45
  text "GREEN" at 19380.76,8315.7 h45
  text "YELLOW" at 19945.76,8315.7 h45
  text "BLUE" at 20430.76,8315.7 h45
  text "OTHER" at 20980.76,8315.7 h45
  text "X" at 18775.76,8310.7 h60
  text "TRACK FINISH:" at 17875.76,8200.7 h60
  text "SELECTIVE SOLDER (HASL)" at 18880.76,8195.7 h45
  text "REFLOW SOLDER" at 20430.76,8195.7 h45
  text "SELECTIVE GOLD" at 18880.76,8075.7 h45
  text "um  (AREA" at 19945.76,8075.7 h45
  text "sq. mm)" at 21040.76,8075.7 h45
  text "X" at 18775.56,7956.14 h60
  text "IMMERSION GOLD" at 18880.76,7955.7 h45
  text "OTHER" at 20430.76,7955.7 h45
  text "EDGE BOARD" at 17875.76,7840.7 h60
  text "1.3um HARD GOLD OVER 5um     NICKEL / TIN-NICKEL" at 18880.76,7835.7 h45
  text "CONTACTS:" at 17875.76,7755.7 h60
  text "HARD FINISH GOLDE PLATE" at 18880.76,7715.7 h45
  text "OTHER" at 20430.76,7715.7 h45
  text "AS SHOWN" at 18880.76,7595.7 h45
  text "REFER" at 20430.76,7595.7 h45
  text "PROFILING:" at 17875.76,7475.7 h60
  text "AS DIMENSIONED, MEASURED AND CUT FROM SPECIFIED DATUM." at 18880.76,7475.7 h45
  text "X" at 18780.76,7470.7 h60
  text "REFER PCB BLANK DWG No." at 18885.76,7360.7 h50
  text "USE PROFILE / ROUTE TAPE SUPPLIED (REFER PATTERN MASTER LIST)" at 18885.76,7240.7 h50
  text "SQUARE CUT" at 18885.76,7120.7 h50
  text "N.C. ROUTE" at 19585.76,7120.7 h50
  text "V. SCORE" at 20285.76,7120.7 h50
  text "BLANK" at 20985.76,7120.7 h50
  text "ACCEPTABILITY:" at 17875.76,7015.7 h60
  text "MATERIALS AND WORKMANSHIP FOR ALL PRINTED WIRING BOARDS TO MEET" at 18750.76,7010.7 h50
  text "OR EXCEED THE REQUIREMENTS OF:" at 18750.76,6900.7 h50
  text "IPC-6011/12 AND IPC-A-600E" at 18890.76,6795.7 h50
  text "1" at 20290.76,6795.7 h50
  text "2" at 20640.76,6795.7 h50
  text "X" at 20535.76,6790.7 h60
  text "X" at 18785.76,6785.7 h60
  text "3" at 20990.76,6710.7 h50
  text "UL CERTIFICATION" at 18890.76,6675.7 h50
  text "AUSTEL" at 20290.76,6675.7 h50
  text "X" at 18785.76,6670.7 h60
  text "ML-P-55110F GRP" at 18870.76,6555.7 h40
  text "A" at 19590.76,6555.7 h50
  text "B" at 19940.76,6555.7 h50
  text "AS2546" at 20290.76,6555.7 h50
  text "OTHER" at 20990.76,6555.7 h50
  text "ADDITIONAL" at 17875.76,6440.7 h60
  text "NONE" at 18890.76,6430.7 h50
  text "SAMPLE PLAN" at 19590.76,6430.7 h50
  text "MIL-P-55110E SERIAL Nos. PER ORDER" at 20290.76,6430.7 h50
  text "REQUIREMENTS:" at 17875.76,6345.7 h60
  text "NONE" at 18890.76,6310.7 h50
  text "X" at 19481.27,6304.56 h60
  text "QUALITY RELEASE REPORT" at 19584.85,6301.92 h50
  text "X" at 19482.02,6185.78 h60
  text "OTHER" at 19584.62,6183.5 h50
  text "MICROSECTION SAMPLE REQUIRED" at 19883.83,6183.5 h50
  text "NONE" at 19590.76,6070.7 h50
  text "REQUIRED" at 20290.76,6070.7 h50
  text "PER ORDER" at 21190.76,6070.7 h50
  text "ELECTRICAL TEST:" at 17875.76,6065.7 h60
  text "X" at 20185.76,6065.7 h60
  text "NONE" at 19590.76,5950.7 h50
  text "1 SIDE" at 20285.76,5950.7 h45
  text "2 SIDES" at 20725.76,5950.7 h45
  text "MIN. PITCH" at 21185.76,5950.7 h50
  text "0.5mm" at 21720.76,5950.7 h50
  text "SURFACE MOUNT:" at 17875.76,5945.7 h60
  text "X" at 20637.77,5942.71 h60
  text "NONE" at 19590.76,5830.7 h50
  text "FOIL" at 20290.76,5830.7 h50
  text "LEGEND" at 20740.76,5830.7 h50
  text "REFER" at 21185.76,5830.7 h50
  text "X" at 20634.81,5829.17 h60
  text "MANUFACTURER'S ID/LOGO:" at 17875.76,5825.7 h60
  text "ISO9001/AS3901" at 19740.76,5710.7 h50
  text "NONE" at 21185.76,5710.7 h50
  text "MANUFACTURER'S ACCREDITATION:" at 17875.76,5705.7 h60
  text "X" at 19635.76,5705.7 h60
  text "PER ORDER" at 19590.76,5590.7 h50
  text "REFER" at 20290.76,5590.7 h50
  text "PACKAGING AND HANDLING:" at 17875.76,5585.7 h60
  text "X" at 19485.76,5580.7 h60
Mechanical 16:
  drawing of 1883 lines, arcs and shapes, not listed
  text "1" at 7819.93,15024.68 h31.5
  text "2" at 9750.59,15024.68 h31.5
  text "3" at 11689.94,15024.68 h31.5
  text "4" at 13630.59,15024.68 h31.5
  text "5" at 15570.59,15024.68 h31.5
  text "6" at 17500.59,15024.68 h31.5
  text "7" at 19450.59,15024.68 h31.5
  text "8" at 21380.59,15024.68 h31.5
  text "A" at 6948.59,13686.68 h31.5
  text "A" at 22248.59,13686.68 h31.5
  text "B" at 6948.59,10906.68 h31.5
  text "B" at 22248.59,10906.68 h31.5
  text "C" at 6948.59,8126.68 h31.5
  text "C" at 22248.59,8126.68 h31.5
  text "D" at 6948.59,5366.68 h31.5
  text "D" at 22248.59,5366.68 h31.5
  text "ENGINEER:" at 17723.59,5359.68 h31.5
  text "TITLE:" at 19223.59,5359.68 h31.5
  text "PCB DESIGNER:" at 17723.59,5064.68 h31.5
  text "PART NO.:" at 19223.59,5059.68 h31.5
  text "REV:" at 21323.59,5059.68 h31.5
  text "DATE:" at 17723.59,4759.68 h31.5
  text "DWG NO:" at 19223.59,4759.68 h31.5
  text "SCALE:" at 21323.59,4759.68 h31.5
  text "Altium Limited" at 16423.59,4659.68 h31.5
  text ".PRINT_DATE" at 17773.59,4639.68 h31.5
  text "12a Rodborough Rd" at 16423.59,4559.68 h31.5
  text "Frenchs Forest" at 16423.59,4459.68 h31.5
  text "FILE NAME:" at 17723.59,4459.68 h31.5
  text "NSW 2086" at 16423.59,4359.68 h31.5
  text ".PCB_FILE_NAME_NO_PATH" at 17773.59,4339.68 h31.5
  text "1" at 7819.93,4124.68 h31.5
  text "2" at 9750.59,4124.68 h31.5
  text "3" at 11689.94,4124.68 h31.5
  text "4" at 13630.59,4124.68 h31.5
  text "5" at 15570.59,4124.68 h31.5
  text "6" at 17500.59,4124.68 h31.5
  text "7" at 19450.59,4124.68 h31.5
  text "8" at 21380.59,4124.68 h31.5
Drill Drawing:
  text ".Legend" at 9352.82,4391.98 h31.5

## Text inside footprints (layer, text, board x,y; h text height)
P2: Top Overlay "19" at 10755.38,9924.19 h59.06; Top Overlay "20" at 10751.45,9829.7 h59.06; Top Overlay "1" at 11873.49,9924.19 h59.06; Top Overlay "2" at 11865.62,9829.7 h59.06
U3: Mechanical 15 "12.8" at 10243.57,8873.01 h35.43 r90; Mechanical 15 "10.0" at 10326.25,8873.01 h35.43 r90
U4: Mechanical 15 "12.8" at 10243.57,6723.41 h35.43 r90; Mechanical 15 "10.0" at 10326.25,6723.41 h35.43 r90
U11: Bottom Overlay "2" at 11156.96,9455.69 h31.5; Bottom Overlay "3" at 11160.89,9357.26 h31.5; Bottom Overlay "1" at 11149.08,9554.11 h31.5